# Altium PCB uicc.PcbDoc
Units mil, origin at the board's own origin, x right, y up, seen from the top; angles counter-clockwise.
Board outline 6000 x 4000 mil, 2 copper layers (Top Layer, Bottom Layer); 123 components, 102 nets, 443 pads, 187 vias.
Unrouted connection lines stored in the file: 1.
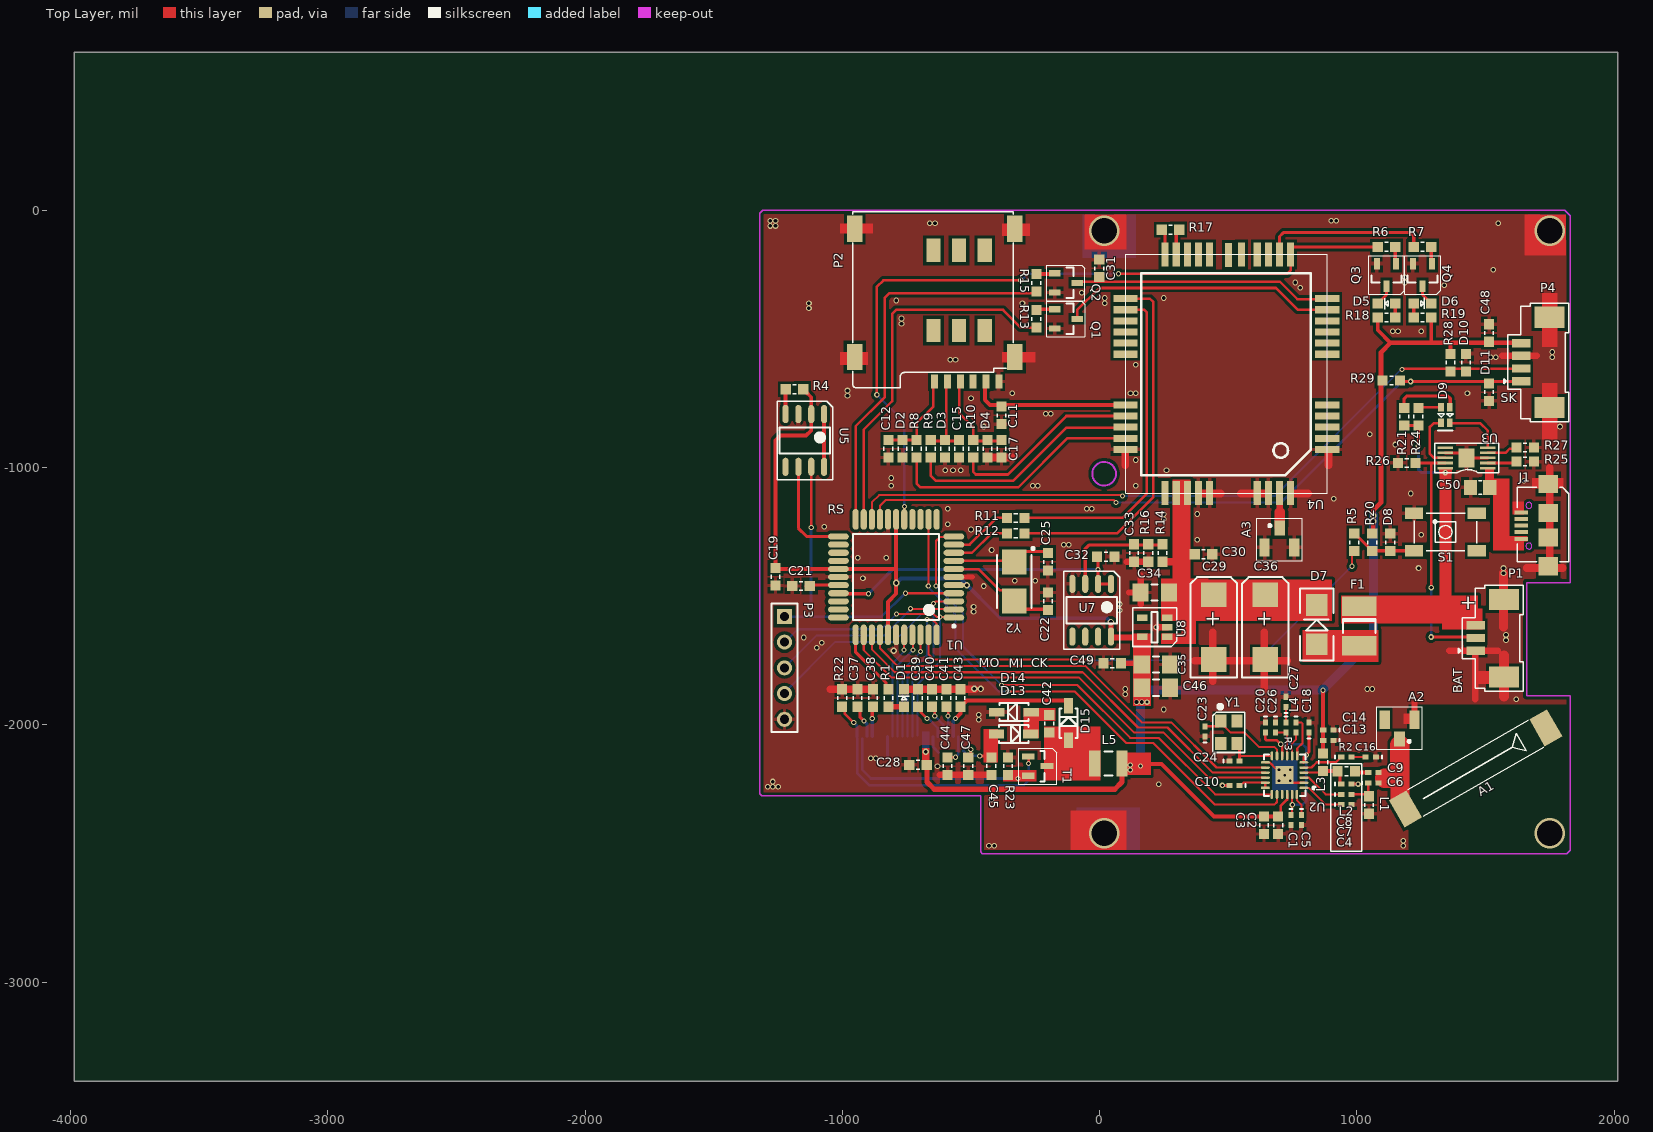
[diagram p0: Top Layer view]
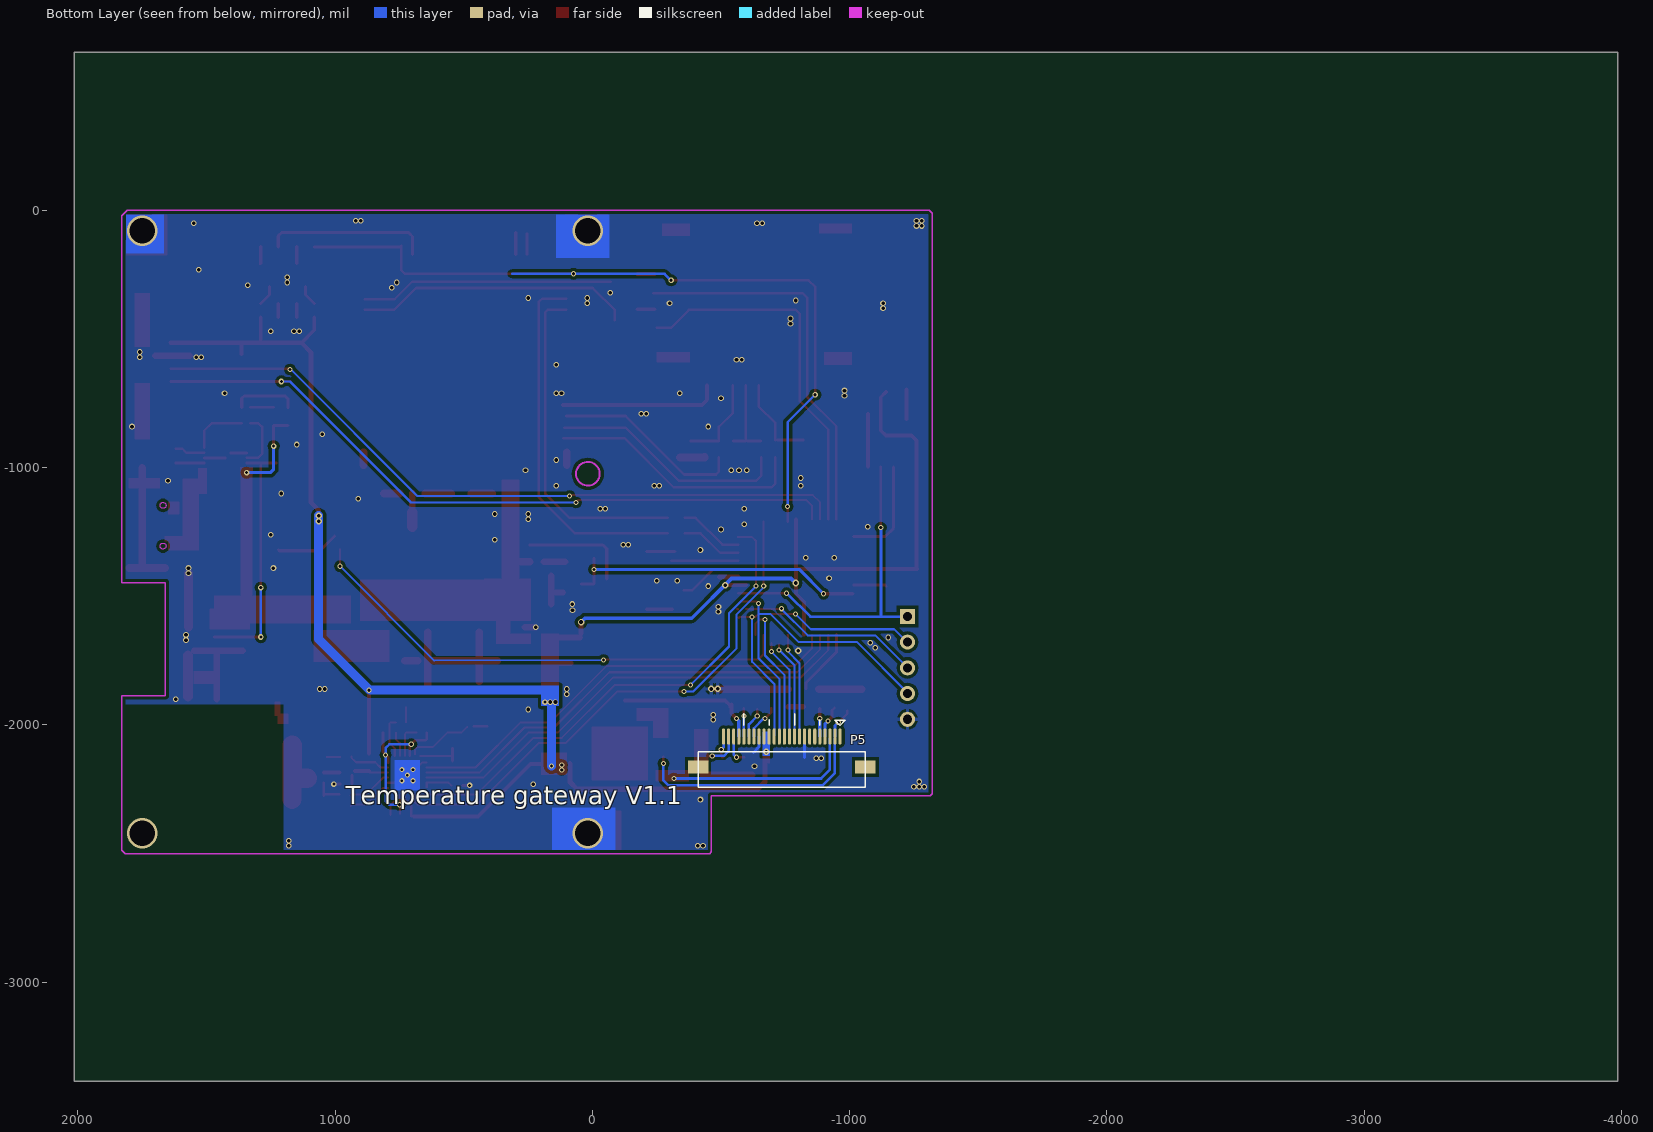
[diagram p1: Bottom Layer view, seen from below]

## Layer stack, top to bottom
Top Solder: solder mask 0.4, Solder Resist, Dk 3.5
Top Layer: signal copper 1.4
Dielectric1: dielectric 12.6, FR-4, Dk 4.8
Bottom Layer: signal copper 1.4
Bottom Solder: solder mask 0.4, Solder Resist, Dk 3.5

## Board outline
-3985.87,-3385 2014.13,-3385 2014.13,615 -3985.87,615

## Design rules (kind name [scope] priority, off if disabled: settings)
Clearance [All] p1 off: gap=12
ComponentClearance [All] p1 off: gap=10 collisioncheckmode=3 verticalgap=10 showdistances=FALSE
FabricationTestPointUsage TestPointUsage [All] p1: valid=0 allowmultiple=FALSE
FabricationTestpoint Testpoint [(IsPad And (OnTopLayer Or OnBottomLayer))] p1: side=3 testpointundercomponent=TRUE minsize=40 maxsize=100 preferedsize=60 minholesize=0 maxholesize=40 preferedholesize=32 testpointgrid=1 allowsidetop=TRUE allowsidebottom=TRUE usegrid=TRUE gridtolerance=0.01
HoleSize [All] p1: absolutevalues=TRUE maxlimit=200 minlimit=1 maxpercent=80.000 minpercent=20.000
PolygonConnect [All] p1: connectstyle=Relief reliefconductorwidth=15 reliefentries=4 polygonreliefangle="90 Angle" airgapwidth=10
RoutingVias [All] p1: holewidth=28 width=50 viastyle="Through Hole" minholewidth=10 minwidth=12 maxholewidth=200 maxwidth=300
SolderMaskExpansion [All] p1: expansion=4
Width [All] p1: maxlimit=200 minlimit=8 preferedwidth=12 minimp=50.000000 maximp=50.000000 favimp=50.000000
26 further rules are at their usual default settings.

## Components (designator, comment, footprint, x,y, rotation, side; value= is the part's Value field where it differs from the comment)
A1 "ANTA" ANTA-433 1189.13,-2326.26 r30 top
A2 "ANTA" IPEX 1166.13,-2008 r270 top
A3 "IPEX" IPEX 699.13,-1281.26 r90 top
C1 "Cap" 0402-A 744.13,-2370 r270 top
C2 "Cap" 0603 694.13,-2390 r270 top
C3 "Cap" 0603 639.13,-2390 r270 top
C4 "Cap" 0402-A 959.13,-2310 r0 top
C5 "Cap" 0402-A 784.13,-2370 r270 top
C6 "Cap" 0402-A 1064.13,-2225 r0 top
C7 "Cap" 0402-A 959.13,-2270 r0 top
C8 "Cap" 0402-A 959.13,-2230 r0 top
C9 "Cap" 0402-A 1064.13,-2185 r0 top
C10 "Cap" 0402-A 524.13,-2235 r180 top
C11 "Cap" 0603 -381.22,-796.26 r90 top
C12 "Cap" 0603 -821.22,-926.26 r90 top
C13 "Cap" 0402-A 889.13,-2060 r180 top
C14 "Cap" 0402-A 889.13,-2020 r180 top
C15 "Cap" 0603 -546.22,-926.26 r270 top
C16 "Cap" 0402-A 1054.13,-2125 r180 top
C17 "Cap" 0603 -381.22,-926.26 r270 top
C18 "Cap" 0402-A 814.13,-2010 r90 top
C19 "Cap" 0603 -1260,-1424 r270 top
C20 "Cap" 0402-A 644.13,-2010 r270 top
C21 "Cap" 0603 -1160.87,-1460 r180 top
C22 "Cap" 0603 -201,-1519 r90 top
C23 "Cap" 0402-A 409.13,-2025 r90 top
C24 "Cap" 0402-A 524.13,-2140 r0 top
C25 "Cap" 0603 -201,-1366 r270 top
C26 "Cap" 0402-A 684.13,-2010 r270 top
C27 "Cap" 0402-A 724.13,-1910 r90 top
C28 "Cap" 0603 -705.87,-2155 r0 top
C29 "Cap Pol3" C7343 444.13,-1620 r270 top
C30 "Cap" 0603 404.13,-1336.26 r180 top
C31 "Cap" 0603 -1.26,-225 r90 top
C32 "Cap" 0603 24.13,-1346.26 r180 top
C33 "Cap" 0603 134.13,-1331.26 r270 top
C34 "Cap" 3216[1206] 214.13,-1485 r180 top
C35 "Cap" 3216[1206] 219.13,-1765 r0 top
C36 "Cap Pol3" C7343 644.13,-1620 r270 top
C37 "Cap" 0603 -940.87,-1895 r270 top
C38 "Cap" 0603 -880.87,-1895 r270 top
C39 "Cap" 0603 -705.87,-1895 r270 top
C40 "Cap" 0603 -650.87,-1895 r270 top
C41 "Cap" 0603 -595.87,-1895 r270 top
C42 "Cap" 0603 -195.87,-1995 r90 top
C43 "Cap" 0603 -540.87,-1895 r270 top
C44 "Cap" 0603 -590.87,-2160 r90 top
C45 "Cap" 0603 -420.87,-2160 r90 top
C46 "Cap" 3216[1206] 219.13,-1855 r0 top
C47 "Cap" 0603 -510.87,-2160 r90 top
C48 "Cap" 0603 1514.13,-476.26 r270 top
C49 "Cap" 0603 49.13,-1760 r180 top
C50 "Cap Pol3" 0805 1479.13,-1076.26 r180 top
D1 "TEST" 0603-LED -760.87,-1895 r90 top
D2 "RL0603E012M100K" 0603 -766.22,-926.26 r270 top
D3 "RL0603E012M100K" 0603 -601.22,-926.26 r270 top
D4 "RL0603E012M100K" 0603 -436.22,-926.26 r270 top
D5 "WORK" 0603-LED 1115.39,-361.26 r180 top
D6 "LINK" 0603-LED 1255.39,-361.26 r0 top
D7 "SS54" SMA 844.13,-1610 r90 top
D8 "RL0603E012M100K" 0603 1130,-1290 r90 top
D9 "LED" 0603-LED-DOUBLE 1344.49,-795.28 r270 top
D10 "RL0603E012M100K" 0603 1424.13,-591.26 r90 top
D11 "RL0603E012M100K" 0603 1514.13,-706.26 r270 top
D13 "MBR0503" SOD-123 -400.87,-2035 r90 top
D14 "MBR0503" SOD-123 -265.87,-1950 r270 top
D15 "MBR0503" SOD-123 -120.87,-2060 r180 top
F1 "Fuse Thermal" 1812 1009.13,-1615 r270 top
J1 "USB-A" MicroUSB 1669.13,-1146.26 r270 top
L1 "Inductor" 0603 1047.13,-2311 r270 top
L2 "Inductor" 0603 959.13,-2180 r0 top
L3 "Inductor" 0603 869.13,-2145 r90 top
L4 "Inductor" 0402-A 764.13,-2010 r270 top
L5 "Inductor" 14-1210 34.13,-2150 r180 top
P1 "BAT" 1.25-3P 1517,-1663 r0 top
P2 "MircoSIM" "MICRO SIM" -446.26,-155 r180 top
P3 "ISP" HDR1X5 -1225,-1578 r270 top
P4 "TMP" 1.25-4P 1638.74,-560 r0 top
P5 "Header 24" FPC-24 -962.76,-2045 r180 bottom locked
Q1 "NPN" SOT-23-NPN -130.87,-421.26 r270 top
Q2 "NPN" SOT-23-NPN -130.87,-281.26 r270 top
Q3 "NPN" SOT-23-NPN 1115.39,-251.26 r180 top
Q4 "NPN" SOT-23-NPN 1255.39,-251.26 r180 top
R1 "Res1" 0603 -820.87,-1895 r270 top
R2 "Res1" 0402-A 959.13,-2125 r0 top
R3 "Res1" 0402-A 724.13,-2010 r270 top
R4 "Res1" 0603 -1185.87,-695 r0 top
R5 "Res1" 0603 990,-1290 r270 top
R6 "Res1" 0603 1115.39,-141.26 r0 top
R7 "Res1" 0603 1255.39,-141.26 r0 top
R8 "Res1" 0603 -711.22,-926.26 r270 top
R9 "Res1" 0603 -656.22,-926.26 r270 top
R10 "Res1" 0603 -491.22,-926.26 r270 top
R11 "Res1" 0603 -325.87,-1195 r180 top
R12 "Res1" 0603 -325.87,-1255 r180 top
R13 "Res1" 0603 -245.87,-421.26 r270 top
R14 "Res1" 0603 244.13,-1331.26 r270 top
R15 "Res1" 0603 -245.87,-281.26 r270 top
R16 "Res1" 0603 189.13,-1331.26 r90 top
R17 "Res1" 0603 275.74,-75 r0 top
R18 "Res1" 0603 1115.39,-416.26 r0 top
R19 "Res1" 0603 1255.39,-416.26 r180 top
R20 "Res1" 0603 1060,-1290 r270 top
R21 "Res1" 0603 1184.13,-801.26 r270 top
R22 "Res1" 0603 -1000.87,-1895 r90 top
R23 "Res1" 0603 -355.87,-2160 r90 top
R24 "Res1" 0603 1239.13,-801.26 r270 top
R25 "Res1" 0603 1654.13,-976.26 r180 top
R26 "Res1" 0603 1194.13,-981.26 r0 top
R27 "Res1" 0603 1654.13,-921.26 r180 top
R28 "Res1" 0603 1364.13,-591.26 r90 top
R29 "Res1" 0603 1134.13,-661.26 r180 top
S1 "SW-PB" SW1 1344.49,-1250 r0 top
T1 "Si1304" SOT-23-NMOS -240.87,-2160 r0 top
U1 "ATmega16" 44A_M -790.87,-1425 r180 top
U2 "A7139" QFN24N 719.13,-2195 r180 top
U3 "BQ24090" MSOP-PowerPAD-10 1509.13,-1001.26 r90 top
U4 "G3524" G3524 469.13,-870 r180 top
U5 "IMP706" SOIC8 -1145.87,-895 r270 top
U7 "LM358D" SOIC8 -30.87,-1555 r270 top
U8 "XC6219B30" SOT23-5N 214.13,-1620 r180 top
Y1 "12.8M" XT3225 534.13,-1985 r270 top
Y2 "XTAL" XT5032 -332,-1442 r270 top

## Footprints (in the part's own frame and the unit in brackets; to place one, negate y for a bottom-side part, rotate by r counter-clockwise, add the part's x,y. Pads: shape width x height; smd on the part's side, far side on the other; paste and mask are expansions set on the pad)
1.25-3P [mil]
  rect 118x83 smd: 0(55.12,-150.59) 0(55.12,150.59)
  rect 71x32 smd: 1(-55.12,-48.23) 2(-55.12,0.98) 3(-55.12,50.2)
  silkscreen extent -123,-206 130,206
1.25-4P [mil]
  rect 71x32 smd: 1(0,-103.43) 2(0,-54.21) 3(0,-5) 4(0,44.21)
  rect 118x83 smd: 5(110.24,-205.79) 6(110.24,144.61)
  silkscreen extent -68,-261 185,200
14-1210 [mm] "Chip Resistor, Body 3.2x2.5mm, IPC High Density"
  rect 1.1x2.6 smd: 1(-1.35,0) 2(1.35,0)
  silkscreen extent -0.4,-1.2 0.4,1.2, body extent -1.68,-1.32 1.68,1.32, height 0.9
44A_M [mm] "44-Pin Thin Quad Flat Pack 0.8 mm Pitch, IPC Low Density"
  oval 2.05x0.6 smd: 1(-5.7,4) 2(-5.7,3.2) 3(-5.7,2.4) 4(-5.7,1.6) 5(-5.7,0.8) 6(-5.7,0) 7(-5.7,-0.8) 8(-5.7,-1.6) 9(-5.7,-2.4) 10(-5.7,-3.2) 11(-5.7,-4) 23(5.7,-4) 24(5.7,-3.2) 25(5.7,-2.4) 26(5.7,-1.6) 27(5.7,-0.8) 28(5.7,0) 29(5.7,0.8) 30(5.7,1.6) 31(5.7,2.4) 32(5.7,3.2) 33(5.7,4)
  oval 0.6x2.05 smd: 12(-4,-5.7) 13(-3.2,-5.7) 14(-2.4,-5.7) 15(-1.6,-5.7) 16(-0.8,-5.7) 17(0,-5.7) 18(0.8,-5.7) 19(1.6,-5.7) 20(2.4,-5.7) 21(3.2,-5.7) 22(4,-5.7) 34(4,5.7) 35(3.2,5.7) 36(2.4,5.7) 37(1.6,5.7) 38(0.8,5.7) 39(0,5.7) 40(-0.8,5.7) 41(-1.6,5.7) 42(-2.4,5.7) 43(-3.2,5.7) 44(-4,5.7)
  silkscreen extent -5.82,-4.25 4.25,4.97, body extent -5,-5 5,5, height 1.2
0402-A [mm] "Chip Inductor; Body 1 x 0.5 mm (LxW typ)"
  rect 0.6x0.5 smd: 1(-0.5,0) 2(0.5,0)
  silkscreen extent -1.1,-0.15 -1.1,0.15
0603 [mm]
  rect 1x1 smd: 1(-0.864,0) 2(0.864,0)
  silkscreen extent -0.18,-0.43 0.18,0.43
0603-LED [mm]
  rect 1x1 smd: 1(-0.864,0) 2(0.864,0)
  silkscreen extent -0.18,-0.51 0.18,0.56
0603-LED-DOUBLE [mil]
  rect 33x22 smd: 1(-30.5,17) 2(30.5,17) 3(-30.5,-17) 4(30.5,-17)
  silkscreen extent -6,-29 61,30
0805 [mm]
  rect 1.3x1.5 smd: 1(-0.95,0) 2(0.95,0)
  silkscreen extent -0.15,-0.66 0.15,0.66
1812 [mm] "Chip Capacitor; Body 4.5 x 3.2 mm (LxW typ)"
  rect 1.9x3.4 smd: 1(-1.95,0) 2(1.95,0)
  silkscreen extent -0.7,-1.6 0.7,1.6
3216[1206] [mm] "Chip Resistor; Body 3.2 x 1.6 mm (LxW typ)"
  rect 1.6x1.8 smd: 1(-1.4,0) 2(1.4,0)
  silkscreen extent -0.3,-0.8 0.3,0.8
ANTA-433 [mm]
  rect 2x3.1 smd: 1(0,0) 2(16,0)
  silkscreen extent 1.14,-1.52 14.86,1.52
C7343 [mm] "Molded Capacitor, 2-Leads, Body 7.3x4.3mm, IPC Medium Density"
  rect 2.45x2.5 smd: 1(-3.2,0) 2(3.2,0)
  silkscreen extent -4.95,-2.29 4.95,2.29, body extent -3.75,-2.25 3.75,2.25, height 4.3
FPC-24 [mm]
  rect 2x1.3 smd: 0(-14,-3) 0(2.5,-3)
  oval 0.3x1.6 smd: 1(0,0) 2(-0.5,0) 3(-1,0) 4(-1.5,0) 5(-2,0) 6(-2.5,0) 7(-3,0) 8(-3.5,0) 9(-4,0) 10(-4.5,0) 11(-5,0) 12(-5.5,0) 13(-6,0) 14(-6.5,0) 15(-7,0) 16(-7.5,0) 17(-8,0) 18(-8.5,0) 19(-9,0) 20(-9.5,0) 21(-10,0) 22(-10.5,0) 23(-11,0) 24(-11.5,0)
  silkscreen extent -14,-5 2.5,2.23
G3524 [mm]
  rect 2.4x0.7 smd: 1(-10.55,1.5) 2(-10.55,0.4) 3(-10.55,-0.7) 4(-10.55,-1.8) 5(-10.55,-2.9) 6(-10.55,-7.9) 7(-10.55,-9) 8(-10.55,-10.1) 9(-10.55,-11.2) 10(-10.55,-12.3) 11(-10.55,-13.4) 21(9.35,-13.4) 22(9.35,-12.3) 23(9.35,-11.2) 24(9.35,-10.1) 25(9.35,-9) 26(9.35,-7.9) 27(9.35,-2.9) 28(9.35,-1.8) 29(9.35,-0.7) 30(9.35,0.4) 31(9.35,1.5)
  rect 0.7x2.4 smd: 12(-6.95,-17.75) 13(-5.85,-17.75) 14(-4.75,-17.75) 15(-3.65,-17.75) 16(1.05,-17.75) 17(2.15,-17.75) 18(3.25,-17.75) 19(4.35,-17.75) 20(5.45,-17.75) 32(5.45,5.8) 33(4.35,5.8) 34(3.25,5.8) 35(2.15,5.8) 36(1.05,5.8) 37(-3.65,5.8) 38(-4.75,5.8) 39(-5.85,5.8) 40(-6.95,5.8) 41(-2.1,-17.75) 42(-0.8,-17.7)
  silkscreen extent -10.55,-17.8 9.35,5.8
HDR1X5 [mm] "Connector; Header; 5 Position"
  rect 1.5x1.5 hole 0.9: 1(0,0)
  round 1.5 hole 0.9: 2(2.54,0) 3(5.08,0) 4(7.62,0) 5(10.16,0)
  silkscreen extent -1.27,-1.27 11.43,1.27
IPEX [mil] "SOT23, 3-Leads, Body 3.0x2.6mm (max), Pitch 0.95mm, IPC Medium Density"
  rect 59.06x41.34 smd: 1(46.5,-0.5)
  rect 70.87x39.37 smd: 2(-28.5,57.5) 3(-28.5,-57.5)
  silkscreen extent -80,-89 86,88
"MICRO SIM" [mm]
  rect 1.55x2.6 smd: 0(-2.95,10.53) 0(-2.95,-2.15) 0(12.85,10.53) 0(12.85,-2.15)
  rect 1.4x2.3 smd: 0(0,7.92) 0(0,0) 0(2.54,7.92) 0(2.54,0) 0(5.08,7.92) 0(5.08,0)
  rect 0.7x1.35 smd: 1(-0.12,12.955) 2(2.42,12.955) 3(4.96,12.955) 5(-1.39,12.955) 6(1.15,12.955) 7(3.69,12.955)
  silkscreen extent -2.82,-3.82 13.05,13.58
MicroUSB [mm]
  rect 1.8x1.9 smd: 0(-2.098,1.905) 0(0.762,1.905) 0(3.175,1.905) 0(6.002,1.905)
  rect 0.4x1.35 smd: 1(3.302,-0.745) 2(2.652,-0.745) 3(2.002,-0.745) 4(1.352,-0.745) 5(0.702,-0.745)
  Keep-Out Layer circle w0.1: c0.006,0 r0.3
  Keep-Out Layer circle w0.1: c4.019,0 r0.3
  silkscreen extent -1.78,-1.14 5.59,3.94
MSOP-PowerPAD-10 [mm]
  rect 0.25x1.55 smd: 1(0,0) 2(0.5,0) 3(1,0) 4(1.5,0) 5(2,0) 6(2,4.2) 7(1.5,4.2) 8(1,4.2) 9(0.5,4.2) 10(0,4.2)
  rect 1.88x1.57 smd: 11(1,2.1)
  silkscreen extent -0.46,-1.07 2.44,5.23
QFN24N [mm] "QFN, 24-Leads, Body 4.1x4.1mm (max), Pitch 0.50mm, IPC Medium Density"
  oval 0.889x0.25 smd: 1(-1.905,1.25) 2(-1.905,0.75) 3(-1.905,0.25) 4(-1.905,-0.25) 5(-1.905,-0.75) 6(-1.905,-1.25) 13(1.905,-1.25) 14(1.905,-0.75) 15(1.905,-0.25) 16(1.905,0.25) 17(1.905,0.75) 18(1.905,1.25)
  oval 0.25x0.889 smd: 7(-1.25,-1.905) 8(-0.75,-1.905) 9(-0.25,-1.905) 10(0.25,-1.905) 11(0.75,-1.905) 12(1.25,-1.905) 19(1.25,1.905) 20(0.75,1.905) 21(0.25,1.905) 22(-0.25,1.905) 23(-0.75,1.905) 24(-1.219,1.905)
  rect 1.8x1.8 smd: 25(0,0)
  silkscreen extent -3.03,-2.05 2.05,2.05, body extent -2.05,-2.05 2.05,2.05, height 0.8
SMA [mm] "Molded Diode, 2-Leads, Body 4.3x2.7mm, IPC Medium Density"
  rect 2.15x2.15 smd: 1(-1.93,0) 2(1.93,0)
  silkscreen extent -3.56,-1.65 3.56,1.65, body extent -2.28,-1.42 2.29,1.42, height 2.95
SOD-123 [mm]
  rect 0.85x1.524 smd: 1(0,0) 2(0,-3.4)
  silkscreen extent -0.9,-3.15 0.9,-0.25
SOIC8 [mm]
  oval 1.8x0.6 smd: 1(-2.625,1.905) 2(-2.625,0.635) 3(-2.625,-0.635) 4(-2.625,-1.905) 5(2.575,-1.905) 6(2.575,-0.635) 7(2.575,0.635) 8(2.575,1.905)
  silkscreen extent -3.89,-2.74 3.84,2.77, body extent -2.03,-2.5 1.97,2.5, height 1.76
SOT23-5N [mm]
  rect 1.05x0.65 smd: 1(-1.225,0.95) 2(-1.225,0) 3(-1.225,-0.95) 4(1.225,-0.95) 5(1.225,0.95)
  silkscreen extent -2.16,-1.91 2.16,1.91, body extent -0.87,-1.5 0.88,1.5, height 1.1
SOT-23-NMOS [mm] "SOT23, 3-Leads, Body 3.0x2.6mm (max), Pitch 0.95mm, IPC Medium Density"
  rect 1.25x0.6 smd: 1(-0.925,0.95) 2(0.925,0) 3(-0.925,-0.95)
  silkscreen extent -1.91,-1.78 1.91,1.78, body extent -0.7,-1.5 0.7,1.5, height 1.1
SOT-23-NPN [mm]
  rect 0.6x1.143 smd: 1(0.95,-1.108) 2(-0.95,-1.108) 3(0,1.108)
  silkscreen extent -1.75,-1.89 1.75,1.87, body extent -1.5,-0.66 1.5,0.74, height 1.1
SW1 [mm]
  rect 1.8x1.1 smd: 1(-3.1,1.85) 2(-3.1,-1.85) 3(3.1,-1.85) 4(3.1,1.85)
  silkscreen extent -3.1,-1.85 3.1,1.85
XT3225 [mm]
  rect 1.3x1.1 smd: 1(0,-1.6) 2(2.2,-1.6) 3(2.2,0) 4(0,0)
  silkscreen extent -1.6,-2.39 3.1,0.76
XT5032 [mm]
  rect 2.5x2.45 smd: 1(-1.925,0) 2(1.925,0)
  silkscreen extent -3.37,-1.7 2.6,1.97, body extent -2.58,-1.68 2.58,1.67, height 1.6

## Part data
A1 A2: library part SMB, "SMB Straight Connector"
C1 C2 C3 C4 C5 C6 C7 C8 C9 C10 C11 C12 C13 C14 C15 C16 C17 C18 C19 C20 C21 C22 C23 C24 C25 C26 C27 C28 C30 C31 C32 C33 C34 C35 C37 C38 C39 C40 C41 C42 C43 C44 C45 C46 C47 C48 C49: "Capacitor"
C29 C36 C50: "Polarized Capacitor (Surface Mount)"
D1 D5 D6: library part LED2, "Typical RED, GREEN, YELLOW, AMBER GaAs LED"
D2 D3 D4 D8 D10 D11: library part "Diode 18TQ045", "Schottky Rectifier"
D7 D13 D14 D15: library part "Diode 1N5408", "3 Amp Medium Power Silicon Rectifier Diode"
D9: library part LED-DOUBLE
F1: "Thermal Fuse"
J1: library part 440314-1, "USB 1.1, Right Angle, Thru-Hole, Series A, Reverse Type, Receptacle, 4 Position, Black"
P1: library part "Header 3", "Header, 3-Pin"
P3: library part "Header 5", "Header, 5-Pin"
P4: library part "Header 4", "Header, 4-Pin"
P5: "Header, 24-Pin"
Q1 Q2 Q3 Q4: library part 2N5551, "NPN General Purpose Amplifier"
R1 R2 R3 R4 R5 R6 R7 R8 R9 R10 R11 R12 R13 R14 R15 R16 R17 R18 R19 R20 R21 R22 R23 R24 R25 R26 R27 R28 R29: "Resistor"
S1: "Switch"
T1: library part IRF644S, "HEXFET N-Channel Power MOSFET"
U1: library part ATmega16-16AI, "8-Bit AVR Microcontroller with 16K Bytes of In-System Programmable Flash Memory"
U5: library part MAX706RCSA, "+3V Voltage Monitoring, Low-Cost, µP Supervisory Circuit"
U7: "Dual Low-Power Operational Amplifier"
U8: library part LP5907
Y1: library part 3225-wy
Y2: "Crystal Oscillator"

## Via types
v1: diameter 22, hole 14, Top Layer to Bottom Layer, 115 vias
v2: diameter 20, hole 12, Top Layer to Bottom Layer, 40 vias
v3: diameter 22, hole 12, Top Layer to Bottom Layer, 10 vias
v4: diameter 20, hole 10, Top Layer to Bottom Layer, tented top, 5 vias
v5: diameter 25, hole 14, Top Layer to Bottom Layer, 4 vias
v6: diameter 118.11, hole 98.43, Top Layer to Bottom Layer, 4 vias
v7: diameter 25, hole 13, Top Layer to Bottom Layer, 3 vias
v8: diameter 20, hole 12.01, Top Layer to Bottom Layer, 2 vias
v9: diameter 22, hole 15, Top Layer to Bottom Layer, 2 vias
v10: diameter 26, hole 14, Top Layer to Bottom Layer, 1 vias
v11: diameter 25, hole 15, Top Layer to Bottom Layer, 1 vias

## Nets (pads, with @x,y where several pads share a name; then routed paths per layer and width w, separated by ;. In a path a pad name is that pad's centre, name@x,y a point inside that pad or via, vN(x,y) a via of type N, cw(c..) or ccw(c..) an arc to the next point about the centre after c; other vN are vias at no path point)
+3V: C2.1 C3.1 C13.2 C14.2 C19.1 C28.2 C35.1 C46.1 C48.2 C49.1 L3.2 L5.1 P4.4 P5.15 P5.16 R4.2 R18.1 R19.1 R20.1 R28.2 R29.2 U1.5 U1.17 U1.27 U1.38 U2.22 U5.2 U7.8 U8.5 | length 8122.9
  Top Layer w10: C2.1@704.13,-2355 704.13,-2315 728.98,-2290.16 U2.22
  Top Layer w15: C19.1@-1262,-1393 -792,-1393 ; C19.1 -1260,-894.13 -1240.87,-875 -1140.87,-875 -1120.87,-855 -1120.87,-726 R4.2@-1140.87,-706 ; U1.38 -822.36,-1521.5 -790.87,-1490 U1.17 ; U1.5@-596.46,-1456.5 v7(-515.87,-1456.5) ; v2@154.13,-2152 241.13,-2152 445.13,-2356 C2.1 ; L3.2 v2(869.13,-1865) ; R18.1 1081.39,-464.82 1130.98,-514.41 ; 1289.39,-509.15 R19.1 ; R28.2 1364.13,-515.28 1365,-514.41
  Top Layer w18: R20.1@1064.13,-1251 1064.13,-1165 1094.13,-1135 1094.13,-551.26 1130.98,-514.41 P4.4@1639.13,-514.41
  Top Layer w20: -670.87,-2120 -670.87,-2221.85 -642.72,-2250 59.13,-2250 87.28,-2221.85 L5.1 ; U7.8@44.13,-1645 v11(44.13,-1600) ; C49.1 C35.1@139.13,-1760
  Top Layer w25: U7.8@49.13,-1660 144.13,-1660
  Bottom Layer w15: v10@-790.87,-1448.87 -772,-1430 -541,-1430 -386,-1585 29.13,-1585 v11(44.13,-1600)
  Bottom Layer w35: v2(159.13,-2160) 159.13,-1895 189.13,-1865 865,-1865 1064.13,-1665.87 v7(1064.13,-1186.26)
  other v2: 119.13,-2175 119.13,-2155
  other v3: 184.13,-1911.26
  other v5: -675.87,-2104.06
  other v7: 1064.13,-1208
  other v9: 144.13,-1911.26 164.13,-1911.26
  other v10: -791,-1448
+4.2V: C29.1 C30.2 C34.1 C36.1 D7.2 R14.2 U4.33 U4.34 U8.1 U8.3 | length 160
  Top Layer w30: R14.2 303.13,-1365.26 ; 319.13,-1470 319.13,-1369
ALT_116: U1.12
D1: R1.1 U1.34 | length 259.3
  Top Layer w12: U1.34 -948.35,-1717.52 -830.87,-1835 R1.1@-830.87,-1860
DOG: U1.23 U5.6 | length 407.7
  Top Layer w12: U5.6 -1170.87,-1235 -1138.35,-1267.52 U1.23
E_BUSY: P5.9 U1.40 | length 414.6
  Top Layer w8: v2(-760.87,-1708.46) -760.87,-1650.91 U1.40
  Bottom Layer w8: P5.9 -805.28,-1759.41 -760.87,-1715 v2(-760.87,-1708.46)
E_CLK: P3.4 P5.13 U1.3 | length 1333.6
  Top Layer w8: v2@-645,-1528 -637,-1520 -576.97,-1520 U1.3@-571.97,-1525
  Bottom Layer w8: P3.4@-1225,-1875 -1027,-1677 -801,-1677 -693,-1569 -647,-1569 ; P5.13 -726.54,-1820.67 -645.87,-1740 -645.97,-1569 v2(-646,-1528)
E_CS: P5.12 U1.44 | length 573.4
  Top Layer w8: v2(-670.87,-1590) -650,-1590 -633.39,-1606.61 U1.44
  Bottom Layer w8: P5.12 -746.22,-1805.35 -670.87,-1730 v2(-670.87,-1590)
E_D/C: P5.11 U1.42 | length 392.6
  Top Layer w8: v2(-695.87,-1715) U1.42@-695.87,-1681.42
  Bottom Layer w8: P5.11 -765.91,-1785.04 v2(-695.87,-1715)
E_RES: P5.10 U1.41 | length 383.8
  Top Layer w8: v2(-725.87,-1708.46) U1.41@-725.87,-1685.91
  Bottom Layer w8: P5.10 -785.59,-1768.19 v2(-725.87,-1708.46)
E_SDI: P3.2 P5.14 U1.1 | length 1214.9
  Top Layer w8: v2@-790,-1569 -645,-1569 -634,-1580 -573.98,-1580 -568.98,-1585 U1.1
  Bottom Layer w8: P3.2@-1228,-1683 -1173,-1628 -849,-1628 -789,-1568 v2@-789,-1567 ; P5.14@-707.87,-2040 -707.87,-1842 -620.87,-1755 v2(-620.87,-1580)
  other v2: -790,-1568
GDR: P5.2 R22.1 T1.1 | length 1039.4
  Top Layer w10: R22.1@-990.87,-1945 -990.87,-1955 v2(-955.87,-1990) ; v2(-275.87,-2150) T1.1@-275.87,-2124.02
  Bottom Layer w10: v2(-955.87,-1990) -943.07,-2002.8 P5.2 ; P5.2@-942.87,-2053 -942.87,-2186 -893.87,-2235 -295.87,-2235 -275.87,-2215 v2(-275.87,-2150)
GIO1: U1.11 U2.19 | length 1970.6
  Top Layer w8: v2(-635.87,-1460) -635.87,-1285 -620.87,-1270 U1.11@-563.98,-1270 ; v2(-380.87,-1845) -85.87,-1845 119.13,-2050 229.13,-2050 449.13,-2270 U2.19
  Bottom Layer w8: v2(-635.87,-1460) -530.87,-1565 -530.87,-1695 v2(-380.87,-1845)
GIO2: U1.13 U2.20 | length 2071.2
  Top Layer w8: v2(-665.87,-1460) U1.13@-665.87,-1209.61 ; v2(-355.87,-1870) -95.87,-1870 104.13,-2070 209.13,-2070 448.66,-2309.53 679.61,-2309.53 689.61,-2299.53 U2.20
  Bottom Layer w8: v2(-665.87,-1460) -665.87,-1465 -560.87,-1570 -560.87,-1701.13 -392,-1870 v2(-355.87,-1870)
GND: A2.2 A3.2 A3.3 C1.2 C2.2 C3.2 C4.2 C5.2 C8.2 C10.2 C11.1 C12.1 C13.1 C14.1 C15.2 C16.1 C17.2 C18.2 C19.2 C20.1 C21.2 C22.2 C23.1 C24.1 C25.2 C26.1 C27.2 C28.1 C29.2 C30.1 C31.2 C32.1 C33.2 C34.2 C35.2 C36.2 C37.1 C38.1 C39.1 C40.1 C41.1 C43.1 C44.1 C45.1 C46.2 C47.1 C48.1 C49.2 C50.2 D1.2 D2.2 D3.2 D4.2 D8.2 D10.2 D11.2 D14.2 J1.0 J1.5 L1.2 P1.0 P1.1 P2.0@-330.12,-70.35 P2.0@-330.12,-569.57 P2.0@-952.17,-70.35 P2.0@-952.17,-569.57 P2.5 P3.5 P4.3 P4.5 P4.6 P5.8 P5.17 Q1.1 Q2.1 Q3.1 Q4.1 R16.1 R22.2 R23.2 R25.1 R26.1 R27.1 S1.1 U1.6 U1.18 U1.28 U1.39 U2.2 U2.13 U2.25 U3.3 U3.7 U3.11 U4.1 U4.31 U4.35 U4.36 U4.37 U4.38 U4.40 U5.3 U7.4 U8.2 | length 4032.5
  Top Layer w8: U2.13 660.92,-2145.79 685.13,-2170 U2.25@689.13,-2170
  Top Layer w9: U2.25@719.61,-2224.53 U2.2
  Top Layer w12: v3@478,-2235 C10.2 ; C8.2 v3@1004,-2230 ; U3.7 U3.11@1406.77,-942.2 ; U3.11 U3.3
  Top Layer w20: U1.6 -495,-1425
  Top Layer w25: -621,-2194 C45.1@-428,-2194 ; 104.74,-1365.26 C33.2 R16.1 ; 115,-1485 C34.2 ; 160,-1530 160,-1420 ; v1(220,-1620) U8.2 ; 1360,-1711.23 1548.77,-1711.23 ; 1460,-1900 P1.1@1460,-1711.23 ; 1565,-565 1700,-565
  Top Layer w30: -1047,-1861 R22.2 C37.1 C38.1 ; D1.2 C39.1 C40.1 C41.1 C43.1 v5@-486,-1861 ; D4.2@-437,-958 D4.2@-436.04,-958.08 ; D4.2 C17.2 -340.26,-960.26 ; 100,-990 U4.31@100,-940 ; 370,-1750 C29.2@430,-1750 ; U4.35@390,-1100 470,-1100 ; 440,-1830 C29.2@440,-1750 ; 440,-1640 C29.2@440,-1750 ; 550,-1100 U4.38@650,-1100 ; 640,-1860 C36.2@640,-1750 ; 640,-1640 C36.2@640,-1750 ; C36.2@680,-1750 730,-1750 ; U4.40@750,-1100 810,-1100 ; 890,-990 U4.1@890,-940 ; 1660,-1390 J1.0@1750,-1390 ; 1750,-1000 J1.0@1750,-1390 ; 1800,-1390 J1.0@1750,-1390 ; C29.2@440,-1750 C36.2@640,-1750
  Top Layer w35: 1570,-1620 v1(1570,-1410)
  Top Layer w40: 1572.12,-1887.88 1572.12,-1730
  Bottom Layer w12: -824.96,-2126.04 P5.8 ; P5.17 -647.8,-2085.2 -626,-2107
  other v1: -430,-2470 -410,-2470 1180,-2470 1180,-2450 -420,-2290 -1290,-2240 -1270,-2240 -1250,-2240 230,-2230 -1270,-2220 -630,-2160 -890,-2130 -870,-2130 -470,-1980 -470,-1960 250,-1940 1620,-1900 100,-1880 100,-1860 1040,-1860 1060,-1860 -1100,-1700 -1080,-1680 1580,-1670 -1150,-1660 1580,-1650 -490,-1560 77.4,-1554 -490,-1540 78.13,-1530 -450,-1460 -330,-1440 -250,-1440 -920,-1430 1240,-1390 1570,-1390 -940,-1350 -830,-1350 -420,-1320 -140,-1300 -120,-1300 380,-1280 1250,-1260 -500,-1240 -1070,-1230 -590,-1220 250,-1200 250,-1180 380,-1180 -590,-1160 -50,-1160 -30,-1160 910,-1120 1210,-1100 -810,-1070 -260,-1070 -240,-1070 140,-1070 1650,-1050 -810,-1040 -600,-1010 -570,-1010 -540,-1010 260,-1010 140,-970 1150,-910 1050,-870 -450,-840 1790,-840 -210,-790 -190,-790 -500,-730 -980,-720 -340,-710 120,-710 140,-710 1430,-710 -980,-700 140,-600 -580,-580 -560,-580 1520,-570 1540,-570 1760,-570 1760,-550 1140,-470 1160,-470 1250,-470 -770,-440 -770,-420 -1130,-380 -1130,-360 -300,-360 20,-360 -790,-350 20,-340 250,-340 -70,-320 780,-300 1340,-290 760,-280 1186.5,-280 1186.39,-260 1530,-230 -1280,-60 -1260,-60 -660,-50 -640,-50 1550,-50 -1280,-40 -1260,-40 900,-40 920,-40
  other v3: 477,-2235 1005,-2230
  other v4: 697.48,-2216.65 740.79,-2216.65 719.13,-2195 697.48,-2173.35 740.79,-2173.35
  other v5: -462,-1860 -487,-1859 -800,-1711
  other v6: 17.72,-2421.26 1750,-2421.26 17.72,-78.74 1750,-78.74
GSM_PW: R13.2 U1.21 | length 1435.2
  Top Layer w10: U1.21 -916.85,-852.24 -806.22,-741.61 -806.22,-401.61 -791.22,-386.61 -375.51,-386.61 -305.87,-456.26 R13.2@-250.87,-456.26
GSM_RST: R15.2 U1.22 | length 1514.4
  Top Layer w10: U1.22 -948.35,-838.74 -835.87,-726.26 -835.87,-340.91 -816.22,-321.26 R15.2@-235.87,-321.26
GSM_RX: R12.2 U1.9 | length 237.9
  Top Layer w10: U1.9 -496.38,-1330.51 -420.87,-1255 R12.2
GSM_TX: R11.2 U1.10 | length 249.7
  Top Layer w10: U1.10 -504.88,-1299.02 -400.87,-1195 R11.2
HLT_CTL: P5.1
LINK_LED: Q4.2 R7.2 | length 67.8
  Top Layer w12: Q4.2@1289.39,-204.22 Q4.2
  Top Layer w15: Q4.2@1289.39,-204.22 R7.2
MISO: P3.3 U1.2 | length 735
  Top Layer w8: v2@-735,-1549 U1.2@-597,-1549 ; U1.2@-566.47,-1550.07 U1.2@-563,-1550
  Bottom Layer w8: P3.3@-1231,-1784 -1099,-1652 -837,-1652 -736,-1551 v2@-736,-1549
  other v2: -735,-1548
NetA1_1: A1.1 A2.1 C6.2 C9.2 | length 272.7
  Top Layer w74.8: 1107.45,-2207 1168.13,-2207 A1.1@1168.13,-2290 ; 1167.13,-2207 A2.1@1167.13,-2078
NetA3_1: A3.1 U4.39 | length 131.7
  Top Layer w25: U4.39 700.13,-1099.03 700.13,-1172.26
  Top Layer w40: A3.1@700.13,-1229.76 700.13,-1172.26
NetC4_1: C4.1 U2.1 | length 174.6
  Top Layer w8: U2.1 813.35,-2244.21 879.13,-2310 934.45,-2310 C4.1@939.45,-2315
NetC5_1: C5.1 U2.24 | length 87.4
  Top Layer w8: U2.24 767.13,-2293 784.13,-2310 C5.1
NetC6_1: C6.1 C7.2 L1.1 | length 106.3
  Top Layer w10: C7.2@983.82,-2270 L1.1@1040.13,-2270 ; L1.1@1044.13,-2275 C6.1@1044.13,-2225
NetC7_1: C7.1 U2.3 | length 174.4
  Top Layer w8: U2.3 813.98,-2204.84 879.13,-2270 934.45,-2270 C7.1@939.45,-2275
NetC8_1: C8.1 L2.1 L3.1 U2.4 | length 165.7
  Top Layer w8: U2.4 L3.1@869.13,-2185.16
  Top Layer w12: C8.1@934.45,-2230 L2.1@934.45,-2194.32
  Top Layer w15: L3.1 L2.1@924.13,-2179
NetC9_1: C9.1 L2.2 | length 61.3
  Top Layer w15: L2.2@983.13,-2185 C9.1
NetC10_1: C10.1 U2.17 U2.18 | length 99.7
  Top Layer w8: C10.1@548.82,-2235 559.29,-2224.53 U2.17
NetC16_2: C16.2 R2.2 | length 55.6
  Top Layer w8: R2.2 C16.2
NetC21_1: C21.1 U1.29 | length 128
  Top Layer w10: C21.1@-1141.87,-1460 C21.1@-1138.36,-1456.5
  Top Layer w12: C21.1@-1138.36,-1456.5 U1.29
NetC22_1: C22.1 U1.7 Y2.2 | length 323.5
  Top Layer w10: U1.7@-543.58,-1395 -542.58,-1394 -470,-1394 -387,-1477 Y2.2@-354.87,-1477
  Top Layer w12: Y2.2@-311,-1550 C22.1@-211,-1550
NetC23_2: C23.2 U2.11 Y1.1 | length 310.4
  Top Layer w8: Y1.1@486.63,-2007.5 509.13,-2030 564.13,-2030 619.13,-2085 679.13,-2085 689.13,-2095 U2.11@689.13,-2114.29
  Top Layer w10: C23.2 Y1.1@461.46,-2005.31
NetC24_2: C24.2 U2.12 Y1.3 | length 176.1
  Top Layer w8: 543.82,-2120 U2.12
  Top Layer w10: C24.2 543.82,-2120 Y1.3@543.82,-2090
NetC25_1: C25.1 U1.8 Y2.1 | length 370
  Top Layer w10: U1.8@-566.87,-1362 Y2.1@-306.87,-1362
  Top Layer w12: Y2.1@-320.87,-1325 C25.1@-210.87,-1325
NetC26_2: C26.2 R3.2 U2.9 | length 125.5
  Top Layer w8: C26.2 R3.2 ; U2.9 R3.2@728.98,-2034.53
NetC27_1: C27.1 R3.1 | length 60.6
  Top Layer w8: R3.1 C27.1
NetC31_1: C31.1 Q2.3 U4.11 | length 984.6
  Top Layer w10: Q2.3@-71.61,-276.26 700.39,-276.26 769.13,-345 U4.11@884.49,-345
NetC33_1: C33.1 R14.1 R16.2 U7.3 | length 422.4
  Top Layer w12: U7.3@-55.87,-1431.64 -55.87,-1315 -41.87,-1301 R14.1@244.13,-1301
NetC39_2: C39.2 P5.18 | length 141
  Top Layer w10: C39.2@-695.87,-1935 -695.87,-1950 v2(-670.87,-1975)
  Bottom Layer w10: v2(-670.87,-1975) -665.87,-1975 -628.11,-2012.76 P5.18
NetC42_1: C42.1 D15.1 L5.2 T1.2
NetC42_2: C42.2 D13.2 D14.1
NetC50_1: C50.1 J1.1 U3.1 | length 2.4
  Top Layer w10: C50.1@1516.54,-1078.66 C50.1
NetD1_1: D1.1 R1.2 | length 60
  Top Layer w20: R1.2 D1.1
NetD5_1: D5.1 R18.2 | length 55
  Top Layer w12: R18.2 D5.1
NetD5_2: D5.2 Q3.3 | length 80.4
  Top Layer w12: D5.2 1115.39,-327.26 Q3.3
NetD6_1: D6.1 R19.2 | length 55
  Top Layer w12: R19.2 D6.1
NetD6_2: D6.2 Q4.3 | length 80.4
  Top Layer w12: Q4.3 1255.39,-327.26 D6.2
NetD7_1: D7.1 F1.2
NetD8_1: D8.1 R5.1 R20.2 S1.2 | length 245.1
  Top Layer w8: S1.2@1216.92,-1323 S1.2@1222.09,-1317.83
  Top Layer w12: R5.1@1002.5,-1266.5 R20.2@1059,-1323
  Top Layer w15: R20.2@1059,-1323 S1.2@1216.92,-1323
NetD9_1: D9.1 R21.1 | length 257.9
  Top Layer w12: R21.1 1184.13,-731.26 1194.13,-721.26 1354.13,-721.26 1363.13,-730.26 D9.1@1363.13,-765.26
NetD9_2: D9.2 U3.5 | length 224.7
  Top Layer w10: D9.2@1363.13,-826.26 1479.13,-826.26 1509.13,-856.26 U3.5
NetD9_3: D9.3 R24.1 | length 90
  Top Layer w10: R24.1@1239.13,-765.26 D9.3@1329.13,-765.26
NetD9_4: D9.4 U3.8 | length 222.3
  Top Layer w10: D9.4@1329.13,-826.26 1299.13,-826.26 1284.13,-841.26 1284.13,-946.26 1299.76,-961.89 U3.8
NetL4_1: L4.1 U2.7 | length 160.6
  Top Layer w8: L4.1 784.45,-1990.32 789.13,-1995 789.13,-2070 768.35,-2090.79 U2.7
NetL4_2: L4.2 U2.8 | length 96.7
  Top Layer w8: U2.8 748.66,-2070.47 764.13,-2055 L4.2
NetQ1_2: Q1.2 R13.1 | length 68
  Top Layer w15: R13.1@-242.46,-383.86 Q1.2
NetQ1_3: Q1.3 U4.10 | length 1081.1
  Top Layer w10: Q1.3@-87.23,-426.26 -87.23,-387.62 -0.87,-301.26 685.39,-301.26 769.88,-385.75 U4.10
NetQ2_2: Q2.2 R15.1 | length 65
  Top Layer w15: R15.1@-240.87,-246.26 Q2.2@-175.87,-246.26
NetR2_1: R2.1 U2.5 | length 163.5
  Top Layer w8: U2.5 823.66,-2165.47 844.13,-2145 919.13,-2145 936.79,-2127.34 R2.1@936.79,-2122.34
NetR4_1: R4.1 U5.4 | length 116.4
  Top Layer w15: U5.4@-1220.87,-811.36 R4.1@-1220.87,-695
NetR7_1: R7.1 U4.13 | length 646.3
  Top Layer w12: U4.13 699.45,-100.94 714.45,-85.94 1208.82,-85.94 1221.39,-98.52 R7.1
NetR8_2: R8.2 U4.30 | length 1011.4
  Top Layer w10: R8.2 -711.22,-1061.26 -696.22,-1076.26 -316.22,-1076.26 -124.96,-885 U4.30@113.78,-885
NetR9_2: R9.2 U4.29 | length 930.1
  Top Layer w10: R9.2 -656.22,-1031.26 -636.22,-1051.26 -336.22,-1051.26 -128.96,-844 U4.29@108.78,-844
NetR10_2: R10.2 U4.28 | length 746.5
  Top Layer w10: R10.2 -491.22,-1016.26 -481.22,-1026.26 -356.22,-1026.26 -128.96,-799 U4.28@101.02,-799
NetR11_1: R11.1 U4.22 | length 1306
  Top Layer w10: R11.1 89,-1195 183.78,-1100.22 183.78,-396.26 173.27,-385.75 U4.22
NetR12_1: R12.1 U4.21 | length 1430.4
  Top Layer w10: R12.1 68,-1255 208.78,-1114.22 208.78,-356.26 194.96,-342.44 U4.21
NetR17_1: R17.1 U4.20 | length 81.4
  Top Layer w12: U4.20 R17.1@254.57,-89.83
NetR25_2: R25.2 U3.2 | length 110.7
  Top Layer w10: U3.2 R25.2@1619.82,-981.57
NetR27_2: R27.2 U3.4 | length 117.6
  Top Layer w10: U3.4 1578.19,-942.2 1594.13,-926.26 R27.2@1620.13,-926.26
NetU5_1: U5.1 U5.8 | length 204.7
  Top Layer w15: U5.8 U5.1
PREVGH: C43.2 D15.2 P5.21 | length 560
  Top Layer w15: v2(-560.87,-1975) -540.87,-1955 C43.2@-540.87,-1920 ; C43.2@-535.87,-1930 -535.87,-1925 -515.87,-1905 D15.2@-125.87,-1905
  Bottom Layer w13: P5.21 -569.06,-1983.19 v2(-560.87,-1975)
PREVGL: C45.2 D13.1 P5.23 | length 183.4
  Top Layer w12: v2(-465.87,-2120) C45.2@-425.87,-2120 ; C45.2@-431.87,-2115 C45.2
  Bottom Layer w10: P5.23 -529.68,-2101.18 -510.87,-2120 v2(-465.87,-2120)
RESE: P5.3 R23.1 T1.3 | length 740.3
  Bottom Layer w10: P5.3@-922.87,-2054 -922.87,-2174 -888.87,-2208 v2(-316.65,-2208)
RST: P3.1 U1.4 U5.7 | length 1274.2
  Top Layer w10: v2@-1120.87,-1233 U5.7 ; v2@-759,-1487.99 U1.4
  Bottom Layer w10: P3.1@-1221,-1579 -847,-1579 v2@-756.5,-1488.5 ; -1122,-1577 v2@-1122,-1234
  other v2: -755,-1488 -1121,-1233
SCK_116: D11.1 P4.1 R29.1 U1.19 | length 2786
  Top Layer w8: U1.19 -853.86,-1147.99 -832.13,-1126.26 55.04,-1126.26 v8@58.78,-1130
  Top Layer w10: R29.1@1174.13,-664.68 P4.1@1639.13,-664.68
  Bottom Layer w8: v8@58.78,-1135 705.39,-1135 1175.71,-664.68 v3(1209.13,-664.68)
  other v8: 63.78,-1135
SCK_7139: U1.36 U2.15 | length 1784.3
  Top Layer w8: U1.36 -885.35,-1705.51 -795.87,-1795 -65.87,-1795 149.13,-2010 264.13,-2010 439.29,-2185.16 U2.15
SCS_7139: U1.37 U2.14 | length 1742.6
  Top Layer w8: U1.37 -853.86,-1702.01 -785.87,-1770 -55.87,-1770 164.13,-1990 279.13,-1990 454.61,-2165.47 U2.14
SDA_116: D10.1 P4.2 R28.1 U1.20 | length 2808.7
  Top Layer w8: U1.20 -885.35,-1134.49 -857.13,-1106.26 85.04,-1106.26 v8(88.78,-1110) ; v2(1175.53,-617.87) v2@1177.92,-615.47
  Top Layer w10: v2@1177.92,-615.47 P4.2@1639.13,-615.47
  Bottom Layer w8: v8(88.78,-1110) 680.39,-1110 1172.53,-617.87 v2(1175.53,-617.87)
SDA_7139: U1.35 U2.16 | length 1826
  Top Layer w8: U1.35 -916.85,-1709.02 -810.87,-1815 -80.87,-1815 134.13,-2030 249.13,-2030 423.98,-2204.84 U2.16
SIM_CLK: C12.2 D2.1 P2.3 R8.1 | length 343.9
  Top Layer w10: R8.1@-711.22,-893 -711.22,-826.65 -646.22,-761.65 P2.3@-646.22,-680.04
  Top Layer w12: C12.2 R8.1@-717.22,-892.26
SIM_DAT: C15.1 D3.1 P2.7 R9.1 | length 320
  Top Layer w10: D3.1@-596.22,-896 P2.7@-596.22,-680.04
  Top Layer w12: R9.1@-656.22,-896.26 D3.1@-602.22,-896.26 ; D3.1@-596.22,-896 C15.1@-546.22,-896
SIM_RST: C17.1 D4.1 P2.2 R10.1 | length 348.7
  Top Layer w10: P2.2@-546.22,-680.04 -546.22,-786.8 -491.22,-841.8 R10.1@-491.22,-896
  Top Layer w12: R10.1@-491.22,-896 C17.1@-381.22,-896
STAT: R6.1 U1.16 U4.12 | length 3265.2
  Top Layer w10: v3@-865.87,-721.26 -865.87,-296.26 -840.87,-271.26 v3(-305.87,-271.26) ; U1.16@-759.37,-1209.76 -758.87,-1209.26 v2(-758.87,-1151.26) ; v2(74.13,-246) 729.04,-246 743.78,-231.26 U4.12@743.78,-136.26
  Top Layer w12: U4.12@748.78,-141.26 R6.1
  Bottom Layer w10: v3(-865.87,-716.26) -758.87,-823.26 v2(-758.87,-1151.26) ; v3(-305.87,-271.26) -280.61,-246 312.13,-246
SW1: R5.2 U1.43 | length 1950.7
  Top Layer w8: U1.43 -664.88,-1725.98 -645.87,-1745 v2@-40.87,-1745 ; v2(981,-1383) R5.2@981,-1317
  Bottom Layer w8: v2(-43.28,-1746.94) 614.24,-1749.76 v2(981,-1383)
TS_IN: P1.2 R26.2 U3.9 | length 973.8
  Top Layer w10: R26.2@1228.45,-981.57 U3.9 ; v3(1289,-1658) P1.2@1471,-1658 ; v3(1289.13,-1466.26) 1289.13,-981.57
  Bottom Layer w10: v3(1289,-1658) 1289,-1466.39 v3(1289.13,-1466.26)
TSCL: P5.6
TSDA: P5.7
VCOM: C47.2 P5.24 | length 76.9
  Top Layer w10: C47.2@-510.87,-2121 C47.2@-505.87,-2126 ; C47.2@-500.87,-2111 v2(-500.87,-2095)
  Bottom Layer w10: P5.24 -510,-2085.87 v2(-500.87,-2095)
VDA: C1.1 C18.1 C20.2 U2.6 U2.10 U2.23 | length 713.3
  Top Layer w8: C1.1@748.66,-2345.79 U2.23
  Top Layer w10: C20.2 644.13,-2055 649.13,-2060 689.13,-2060 709.29,-2080.16 U2.10 ; U2.6 794.13,-2125 814.13,-2105 C18.1
  Bottom Layer w10: v2(704.13,-2075) 789.13,-2075 804.13,-2090 804.13,-2295 789.13,-2310 v2(749.13,-2310)
  other v2: 804.13,-2116.27
VDD3.0: R17.2 U4.19 | length 86.3
  Top Layer w12: U4.19 R17.2@297.87,-84.87
VGH: C38.2 P5.5 | length 108.2
  Top Layer w12: v2(-883.8,-1975) C38.2@-883.8,-1936.93
  Bottom Layer w12: P5.5 -883.8,-2044.78 v2(-883.8,-1975)
VGL: C37.2 P5.4 | length 126.4
  Top Layer w12: C37.2@-940.87,-1934 -930.87,-1944 -930.87,-1970 v2(-915.87,-1985)
  Bottom Layer w12: v2(-915.87,-1985) -903.7,-1997.17 P5.4
VIN: F1.1 P1.3 R21.2 R24.2 U3.10 | length 881.4
  Top Layer w12: R21.2 R24.2 v3(1239.13,-916.26)
  Top Layer w47.24: 1344.13,-1571.26 v3@1344.13,-1026.26
  Bottom Layer w12: v3(1239.13,-916.26) 1239.13,-1006.26 1252.13,-1019.26 v3(1344.13,-1019.26)
VPP: C40.2 P5.19 | length 119.4
  Top Layer w10: v2(-640.87,-1965) C40.2@-640.87,-1939
  Bottom Layer w10: v2(-640.87,-1965) -608.43,-1997.44 P5.19
VSA: C32.2 U1.30 U7.1 U7.2 | length 1196
  Top Layer w12: U1.30@-1013.27,-1490 v2(-899,-1490) ; C32.2@-5.87,-1351 U7.2 U7.1
  Bottom Layer w12: v2@-898,-1489 -804,-1395 v2(-5.87,-1395)
VSH: C41.2 P5.20 | length 108.9
  Top Layer w10: v2(-588.8,-1965) C41.2@-588.8,-1936.07
  Bottom Layer w10: P5.20 v2@-588.74,-1965.06
VSIM: C11.2 P2.1 U4.27 | length 624.1
  Top Layer w15: P2.1@-446.14,-680.04 -446.14,-735.98 -426.3,-755.83 U4.27@113.78,-755.83
VSL: C44.2 P5.22 | length 120
  Top Layer w10: C44.2 -590.37,-2125.5 v2(-560.87,-2125.5) v2@-560.87,-2121
  Bottom Layer w10: v2(-560.87,-2125.5) -549.37,-2114 P5.22
WORK_LED: Q3.2 R6.2 | length 63
  Top Layer w15: Q3.2@1149.39,-204.22 R6.2
pads on no net: A1.2 A2.3 J1.2 J1.3 J1.4 P2.0@-446.26,-155 P2.0@-446.26,-466.81 P2.0@-546.26,-155 P2.0@-546.26,-466.81 P2.0@-646.26,-155 P2.0@-646.26,-466.81 P2.6 P5.0 S1.3 S1.4 U1.14 U1.15 U1.24 U1.25 U1.26 U1.31 U1.32 U1.33 U2.21 U3.6 U4.2 U4.3 U4.4 U4.5 U4.6 U4.7 U4.8 U4.9 U4.14 U4.15 U4.16 U4.17 U4.18 U4.23 U4.24 U4.25 U4.26 U4.32 U4.41 U4.42 U5.5 U7.5 U7.6 U7.7 U8.4 Y1.2 Y1.4

## Polygon pours and split planes (outlines as drawn)
GND on Top Layer "GND_L01_P006" (solid, remove dead copper, pour order 6): -1493,166 -1470,189 2063,189 2063,-2474 1847,-2690 1824,-2667 -1487,-2667
GND on Bottom Layer "GND_L02_P012" (solid, remove dead copper, pour order 12): -1438,89 1904,89 1917,76 1917,-2652 -1343,-2652 -1400,-2595

## Keep-outs
Keep-Out Layer:
  circle w8: c17.72,-1023.62 r46.1
  lines w5: 1660,-1446.26 1828.74,-1446.26 1828.74,-20.87 1807.87,0 -1309.87,0 -1320.87,-11 -1320.87,-2268 -1313.28,-2275.59 -462.87,-2275.59 -462.87,-2493 -455.87,-2500 1815.39,-2500 1828.74,-2486.65 1828.74,-1886.26
  lines w6: 1660,-1446.26 1660,-1886.26 1828.74,-1886.26

## Other copper
Top Layer:
  rectangle net GND: 1720,-530 1780,-320
  rectangle net GND: 1720,-890 1780,-670
  rectangle net GND: 1680,-1080 1802.87,-1040
  rectangle net GND: 1460,-1840 1550,-1790
  rectangle net GND: -1010,-90 -880,-50
  rectangle net GND: -1010,-600 -900,-550
  rectangle net GND: -380,-590 -250,-550
  rectangle net GND: -380,-100 -270,-50
  rectangle net GND: -113,-2486 105,-2332
  rectangle net GND: 1652,-175 1814,-15
  rectangle net GND: 1212,-1966 1236,-1909
  rectangle net GND: 1181,-1997 1224,-1955
  rectangle net GND: -58,-152 104,-15
  rectangle net GND: 1606,-1182 1649,-1132
  rectangle net VIN: 1331,-1629 1489,-1547
  rectangle net NetC50_1: 1499.13,-1101.26 1534.13,-1001.26
  rectangle net VIN: 1159.13,-1602 1369.13,-1551.26
  rectangle net VIN: 939.13,-1605 1472,-1496.26
  rectangle net VIN: 1319.13,-1026.26 1369.13,-996.26
  rectangle net NetC42_2: -255.87,-1985 -170.87,-1935
  rectangle net NetC42_2: -295.87,-2050 -235.87,-1935
  rectangle net NetC42_1: -215.87,-2215 3.74,-2005
  rectangle net RESE: -375.87,-2219.06 -245.87,-2175
  rectangle net PREVGL: -450.87,-2145 -395.87,-2015
  rectangle net +3V: -690.87,-2150 -660.87,-2090
  rectangle net +3V: 98.13,-2195 199.13,-2107
  region net +3V: 199.13,-1926.26 199.13,-1821.26 129.13,-1821.26 129.13,-1926.26
  rectangle net +4.2V: 374.13,-1595 904.13,-1435
  rectangle net NetD7_1: 789.13,-1755 1084.13,-1630
  rectangle net +4.2V: 239.13,-1595 424.13,-1430
  rectangle net +4.2V: 319.13,-1685 374.13,-1590
  rectangle net +4.2V: 239.13,-1685 354.13,-1645
  rectangle net +3V: 129.13,-1895 199.13,-1645
  rectangle net NetC10_1: 638.43,-2245 649.13,-2220
  rectangle net +4.2V: 284.13,-1456.26 354.13,-1046.26
  rectangle net NetC50_1: 1574.13,-1286.26 1664.13,-1266.26
  rectangle net NetC50_1: 1529.13,-1286.26 1594.13,-1041.26
  rectangle net NetC50_1: 1554.13,-1286.26 1594.13,-1236.26
  rectangle net NetC50_1: 1529.13,-1321.26 1649.13,-1271.26
  pour cut-out: 1820,-1920 1820,-2480 1810,-2490 1200,-2490 1200,-1920
  pour cut-out: -783,-1303 -723,-1303 -700,-1326 -700,-1473 -779,-1473 -782,-1476
  pour cut-out: -418,-2141 -416,-2143 -362,-2143 -362,-2184 -363,-2185 -365,-2183 -417,-2183
  text "String" at 675,1594 h60
  text "String" at 675,1594 h60
Bottom Layer:
  rectangle net GND: 1666,-168 1814,-15
  rectangle net GND: 670,-2255 770,-2136
  rectangle net GND: -90,-2486 157,-2321
  rectangle net GND: -66,-185 141,-15
  rectangle net +3V: -690.87,-2120 -660.87,-2025
  rectangle net +3V: 129.13,-1926.26 199.13,-1846.26
  pour cut-out: 1200,-1920 1820,-1920 1820,-2480 1810,-2490 1200,-2490

## Silkscreen, mask and mechanical layers (free items; w line width, h text height)
Top Overlay:
  lines w5: 899.13,-2490 899.13,-2150 1019.13,-2150 1019.13,-2490 899.13,-2490
  text "SK" at 1559.13,-756.26 h60
  text "RS" at -1056.22,-1191.26 h60
  text "+" at 1400,-1570 h100
  text "MO" at -469.87,-1788 h60
  text "CK" at -265.87,-1788 h60
  text "MI" at -352.87,-1789 h60
Bottom Overlay:
  text "Temperature gateway V1.1" at 958.78,-2331.26 h120

## Text inside footprints (layer, text, board x,y; h text height)
C29: Top Overlay "+" at 416.13,-1555 h59.06 r270
C36: Top Overlay "+" at 616.13,-1555 h59.06 r270